# Altium PCB SSR.PcbDoc
Units mm, origin at the board's own origin, x right, y up, seen from the top; angles counter-clockwise.
Board outline 72 x 64 mm, 2 copper layers (Top Layer, Bottom Layer); 27 components, 16 nets, 66 pads, 0 vias.
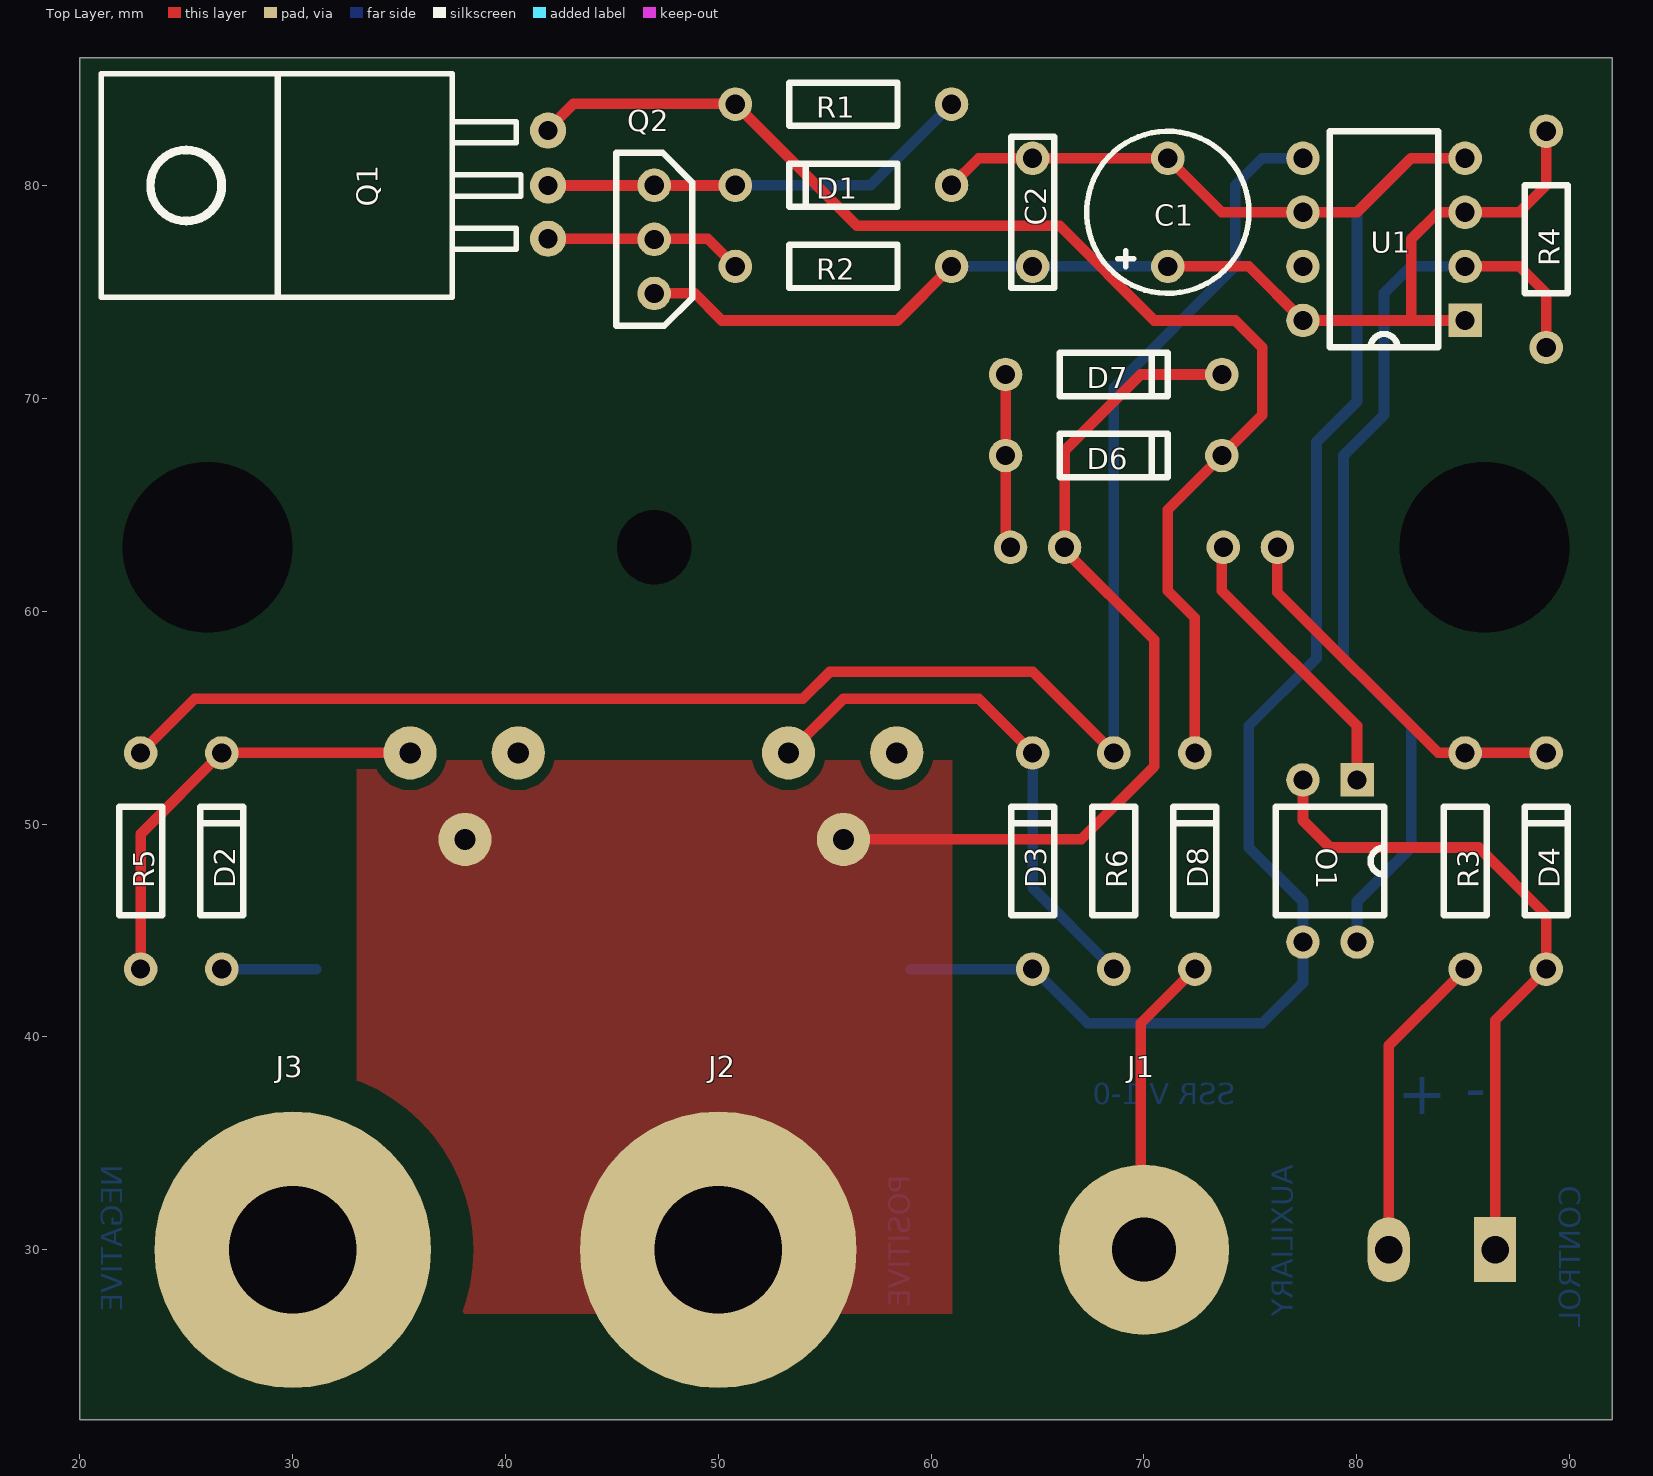
[diagram p0: Top Layer view]
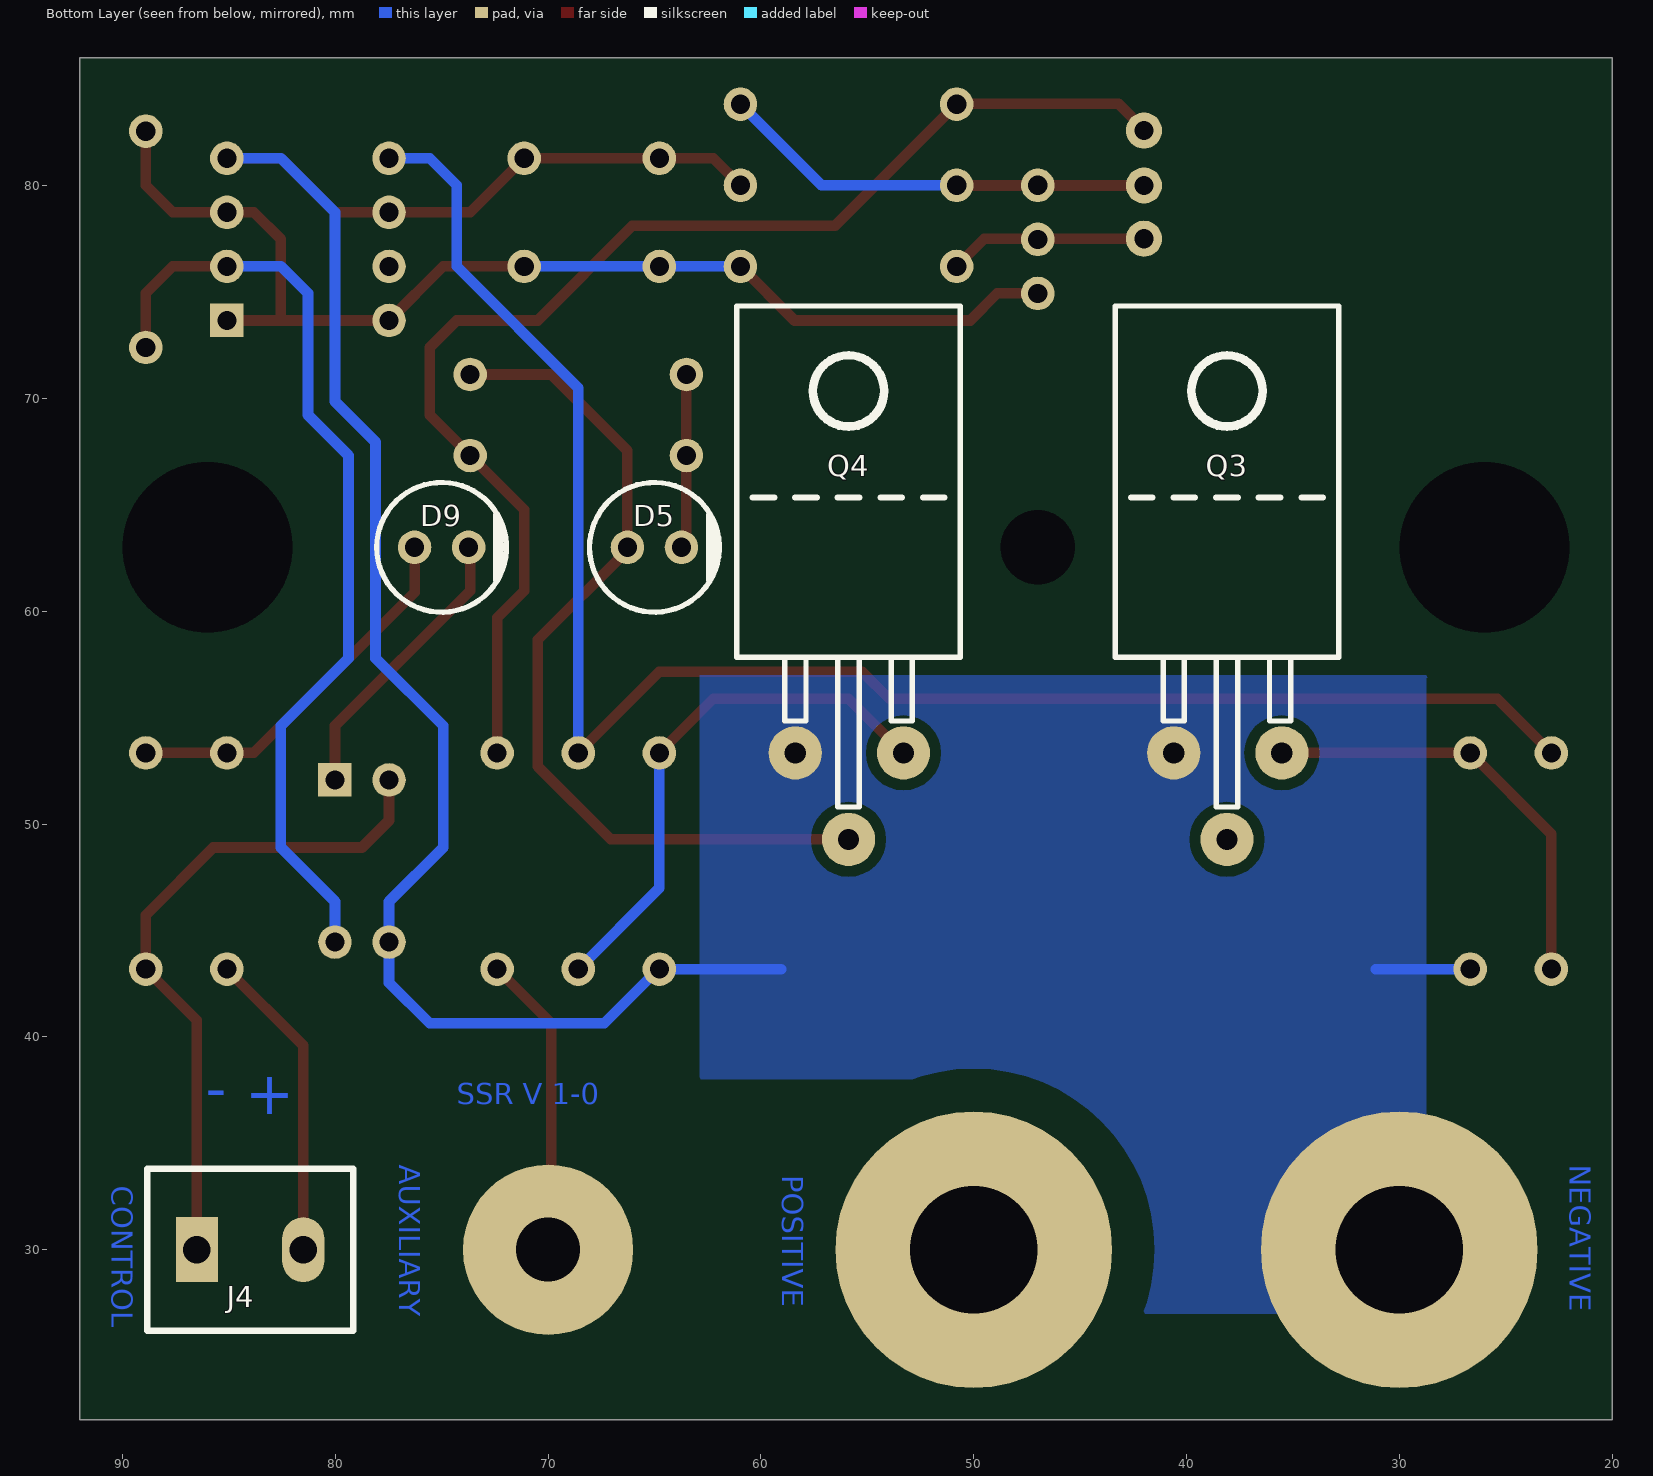
[diagram p1: Bottom Layer view, seen from below]

## Layer stack, top to bottom
Top Layer: signal copper 0.0356
Dielectric: dielectric 0.32, FR-4, Dk 4.8
Bottom Layer: signal copper 0.0356

## Board outline
20,22 92,22 92,86 20,86

## Design rules (kind name [scope] priority, off if disabled: settings)
Clearance Clearance_2 [(InComponent('J2')) vs (NOT IsText)] p1: gap=2
Clearance Clearance_1 [(InComponent('J3')) vs (NOT IsText)] p2: gap=2
Clearance [All] p3: gap=0.5
ComponentClearance [All] p1: gap=0.254 collisioncheckmode=3 verticalgap=0.254
HoleSize [All] p1: absolutevalues=TRUE maxlimit=10 minlimit=0.025 maxpercent=80.000 minpercent=20.000
PolygonConnect [All] p1: connectstyle=Direct reliefconductorwidth=0.254 reliefentries=4 polygonreliefangle="90 Angle"
RoutingVias [All] p1: holewidth=0.711 width=1.27 viastyle="Through Hole" minholewidth=0.711 minwidth=1.27 maxholewidth=10 maxwidth=10
SolderMaskExpansion [All] p1: expansion=0.102
TestPointUsage [All] p1: valid=0 allowmultiple=FALSE
Testpoint [All] p1: side=15 testpointundercomponent=TRUE minsize=1.016 maxsize=2.54 preferedsize=1.524 minholesize=0 maxholesize=1.016 preferedholesize=0.813 testpointgrid=0.025 style=1023 order=0-112345678
Width [All] p1: maxlimit=10 minlimit=0.5 preferedwidth=0.5
17 further rules are at their usual default settings.

## Components (designator, comment, footprint, x,y, rotation, side; value= is the part's Value field where it differs from the comment)
C1 "10U" RADIAL02P 71.12,76.2 r90 top
C2 "100N" AXIAL02 64.77,76.2 r90 top
D1 "12V" DO35S 60.96,80.01 r180 top
D2 "12V" DO35S 26.67,43.18 r90 top
D3 "12V" DO35S 64.77,43.18 r90 top
D4 "1N4148" DO35S 88.9,43.18 r90 top
D5 "AMBER" LED5MM 65,63 r180 bottom
D6 "D-1N4148" DO35S 63.5,67.31 r0 top
D7 "D-1N4148" DO35S 63.5,71.12 r0 top
D8 "D-1N4148" DO35S 72.39,43.18 r90 top
D9 "RED" LED5MM 75,63 r180 bottom
J1 "TERM" SCREW3 67,30 r0 top
J2 "TERM" SCREW6 50,30 r0 top
J3 "TERM" SCREW6 30,30 r0 top
J4 "TERM" MKD500S2 86.5,30 r180 bottom
O1 "FOD817B" DIP4 80.01,52.07 r270 top
Q1 "BD239C" TO220 42,80 r90 top
Q2 "BC548" TO92 46.99,74.93 r90 top
Q3 "STP150N10F7" TO220FS 38.1,53.34 r180 bottom
Q4 "STP150N10F7" TO220FS 55.88,53.34 r180 bottom
R1 "100K" AXIAL04 60.96,83.82 r180 top
R2 "33R" AXIAL04 60.96,76.2 r180 top
R3 "330R" AXIAL04 85.09,53.34 r270 top
R4 "10K" AXIAL04 88.9,72.39 r90 top
R5 "1K" AXIAL04 22.86,53.34 r270 top
R6 "1K" AXIAL04 68.58,53.34 r270 top
U1 "IR2104" DIP8 85.09,73.66 r180 top

## Footprints (in the part's own frame and the unit in brackets; to place one, negate y for a bottom-side part, rotate by r counter-clockwise, add the part's x,y. Pads: shape width x height; smd on the part's side, far side on the other; paste and mask are expansions set on the pad)
AXIAL02 [mil]
  round 62 hole 35.43: 1(0,0) 2(200,0)
  silkscreen extent -40,-40 240,40
AXIAL04 [mil]
  round 62 hole 35.43: 1(0,0) 2(400,0)
  silkscreen extent 100,-40 300,40
DIP4 [mil]
  rect 62x62 hole 35.43: 1(0,0)
  round 62 hole 35.43: 2(0,-100) 3(300,-100) 4(300,0)
  silkscreen extent 50,-150 250,50
DIP8 [mil]
  rect 62x62 hole 35.43: 1(0,0)
  round 62 hole 35.43: 2(0,-100) 3(0,-200) 4(0,-300) 5(300,-300) 6(300,-200) 7(300,-100) 8(300,0)
  silkscreen extent 50,-350 250,50
DO35S [mil]
  round 62 hole 35.43: 1(0,0) 2(400,0)
  silkscreen extent 100,-40 300,40
LED5MM [mil]
  round 62 hole 35.43: 1(-50,0) 2(50,0)
  silkscreen extent -120,-120 120,120
MKD500S2 [mil]
  rect 78x120 hole 51.18: 1(0,0)
  oval 78x120 hole 51.18: 2(196.85,0)
  silkscreen extent -92,-150 289,150
RADIAL02P [mil]
  round 62 hole 35.43: 1(0,0) 2(200,0)
  silkscreen extent -50,-150 250,150
SCREW3 [mm]
  round 8 hole 3: 1(3,0)
SCREW6 [mm]
  round 13 hole 6: 1(0,0)
TO92 [mil]
  round 62 hole 35.43: 1(0,0) 2(100,0) 3(200,0)
  silkscreen extent -60,-70 260,70
TO220 [mm] "TO220"
  round 1.7 hole 0.9: 1(-2.5,0) 2(0,0) 3(2.58,0)
  silkscreen extent -5.25,1.27 5.25,21
TO220FS [mm] "TO220 Flat Reverse"
  round 2.5 hole 1: 1(2.58,0) 2(0,-4.064) 3(-2.5,0)
  silkscreen extent -5.25,-2.54 5.25,21

## Part data
C1: library part C-A10U, "CAP"
C2: library part C-B100N, "CAPACITOR"
D1 D2 D3: library part D-BZX79-12, "ZENER DIODE"
D5: library part O-AMBER, "LED"
D6 D7 D8: "1N4148"
D9: library part O-RED, "LED"
J1: library part J-SCREW3, "CONNECTOR"
J2 J3: library part J-SCREW6, "CONNECTOR"
J4: library part J-CTB93, "CONNECTOR"
O1: library part O-VOH1016AD, "OPTO ISOLATOR"
Q1: library part Q-BD239C
Q2: library part Q-BC548
Q3 Q4: library part Q-STP150N10F7, "MOSFET"
R1: library part R-A100K, "RESISTOR"
R2: library part R-A33R, "RESISTOR"
R3: library part R-A330R, "RESISTOR"
R4: library part R-A33K, "RESISTOR"
R5 R6: library part R-A1K, "RESISTOR"
U1: library part U-IR2104, "GATE DRIVER"

## Free pads (board coordinates)
  round 0 hole 8 unplated: 0(26,63) 0(86,63)
  round 0 hole 3.5 unplated: 0(47,63)

## Nets (pads, with @x,y where several pads share a name; then routed paths per layer and width w, separated by ;. In a path a pad name is that pad's centre, name@x,y a point inside that pad or via, vN(x,y) a via of type N, cw(c..) or ccw(c..) an arc to the next point about the centre after c; other vN are vias at no path point)
AUX: D8.1 J1.1 | length 14.2
  Top Layer w0.5: J1.1@69.85,30 69.85,40.64 D8.1
NEG: C1.2 C2.2 D1.1 D2.1 D3.1 J3.1 O1.3 Q3.3 Q4.3 U1.4 U1.6 | length 97
  Top Layer w0.5: D1.1 62.23,81.28 C1.2 73.66,78.74 80.01,78.74 82.55,81.28 U1.4
  Bottom Layer w0.5: D2.1 31.115,43.18 ; Q3.3@40.6,53.38 Q3.3 Q3.3@40.64,53.34 ; 59.055,43.18 64.82,43.18 67.36,40.64 75.565,40.64 77.47,42.545 77.47,46.355 74.93,48.895 74.93,54.61 78.105,57.785 78.105,67.945 80.01,69.85 80.01,78.74 82.55,81.28 U1.4
NetD1_2: D1.2 Q1.2 Q2.3 R1.1 | length 20.5
  Top Layer w0.5: Q1.2 D1.2@50.8,80
  Bottom Layer w0.5: D1.2 57.15,80.01 R1.1
NetD2_2: D2.2 Q3.1 R5.2 | length 20.6
  Top Layer w0.5: R5.2 22.86,49.53 D2.2 Q3.1
NetD3_2: D3.2 Q4.1 R6.2 | length 25.3
  Top Layer w0.5: Q4.1 53.34,53.34 55.88,55.88 62.23,55.88 D3.2
  Bottom Layer w0.5: D3.2 64.77,46.99 R6.2
NetD4_1: D4.1 J4.1 O1.2 | length 31.9
  Top Layer w0.5: O1.2 77.47,50.165 78.74,48.895 85.725,48.895 88.9,45.72 D4.1 86.5,40.78 J4.1
NetD4_2: D4.2 D9.1 R3.1 | length 17.9
  Top Layer w0.5: D9.1 76.27,60.89 83.82,53.34 D4.2
NetD5_2: D5.2 D6.1 D7.1 | length 8.1
  Top Layer w0.5: D5.2@63.5,63 D7.1
NetD6_2: D6.2 D8.2 Q1.3 R1.2 | length 60.4
  Top Layer w0.5: Q1.3 41.94,82.58 43.195,83.835 50.785,83.835 56.515,78.105 66.04,78.105 70.485,73.66 74.295,73.66 75.565,72.39 75.565,69.215 71.12,64.77 71.12,60.96 72.39,59.69 D8.2
NetD9_2: D9.2 O1.1 | length 13.5
  Top Layer w0.5: D9.2@73.66,62.93 73.66,60.96 80.01,54.61 O1.1
NetJ4_2: J4.2 R3.2 | length 14.7
  Top Layer w0.5: J4.2 81.5,39.59 R3.2
NetO1_4: O1.4 R4.1 U1.2 | length 44.8
  Top Layer w0.5: U1.2 87.63,76.2 88.9,74.93 R4.1
  Bottom Layer w0.5: O1.4 80.01,46.355 82.55,48.895 82.55,54.61 79.375,57.785 79.375,67.31 81.28,69.215 81.28,74.93 82.55,76.2 U1.2
NetQ1_1: Q1.1 Q2.2 R2.2 | length 9.3
  Top Layer w0.5: Q1.1 49.5,77.5 R2.2
NetR5_1: R5.1 R6.1 U1.5 | length 81.6
  Top Layer w0.5: R5.1 25.4,55.88 53.975,55.88 55.245,57.15 64.77,57.15 R6.1
  Bottom Layer w0.5: R6.1 68.58,70.485 74.295,76.2 74.295,80.01 75.565,81.28 U1.5
POS: D5.1 D7.2 J2.1 Q3.2 Q4.2 | length 45.1
  Top Layer w0.5: Q4.2 67.056,49.276 70.485,52.705 70.485,58.65 D5.1@66.27,62.865 ; D5.1 66.27,67.54 69.85,71.12 D7.2
  Top Layer w2: J2.1@46.2,30 J2.1
VCC: C1.1 C2.1 Q2.1 R2.1 R4.2 U1.1 U1.3 U1.8 | length 54.5
  Top Layer w0.5: Q2.1 48.895,74.93 50.165,73.66 58.42,73.66 R2.1 ; C1.1 74.93,76.2 U1.8 U1.1 ; 82.55,73.66 82.55,77.47 83.82,78.74 87.63,78.74 88.9,80.01 R4.2
  Bottom Layer w0.5: R2.1 C1.1
pads on no net: U1.7

## Polygon pours and split planes (outlines as drawn)
POS on Top Layer "Bottom Layer-No Net" (solid, remove dead copper, pour order 1000): 59.135,27 33.02,27 33.02,53 61,53 61,27 59.135,27
NEG on Bottom Layer "Bottom Layer-No Net" (solid, remove dead copper, pour order 1001): 28.736,57 62.86,57 62.86,38.135 63,38 49.502,38 49.502,27 28.736,27 28.736,56.845 28.575,57

## Other copper
Bottom Layer:
  text "+ -" at 81.915,38.1 h2 r180
  text "SSR V 1-0" at 74.295,36.83 h1
  text "NEGATIVE" at 22,34 h1 r90
  text "AUXILIARY" at 77,34 h1 r90
  text "POSITIVE" at 59,33.5 h1 r90
  text "CONTROL" at 90.5,33 h1 r90

## Silkscreen, mask and mechanical layers (free items; w line width, h text height)
Mechanical 1:
  lines w0.3: 20,40 92,40